# Altium PCB Main_Board.PcbDoc (part 8 of 14)
Units mm, origin at the board's own origin, x right, y up, seen from the top; angles counter-clockwise.
Board outline 142 x 82 mm, 10 copper layers (L1_Top, L2_PWR1, L3_Sig1, L4_GND1, L5_Sig2, L6_Sig3, L7_GND2, L8_Sig4, L9_GND3, L8_Bottom), stack 1.71 mm thick; 299 components, 328 nets, 2329 pads, 2908 vias.
Unrouted connection lines stored in the file: 2.
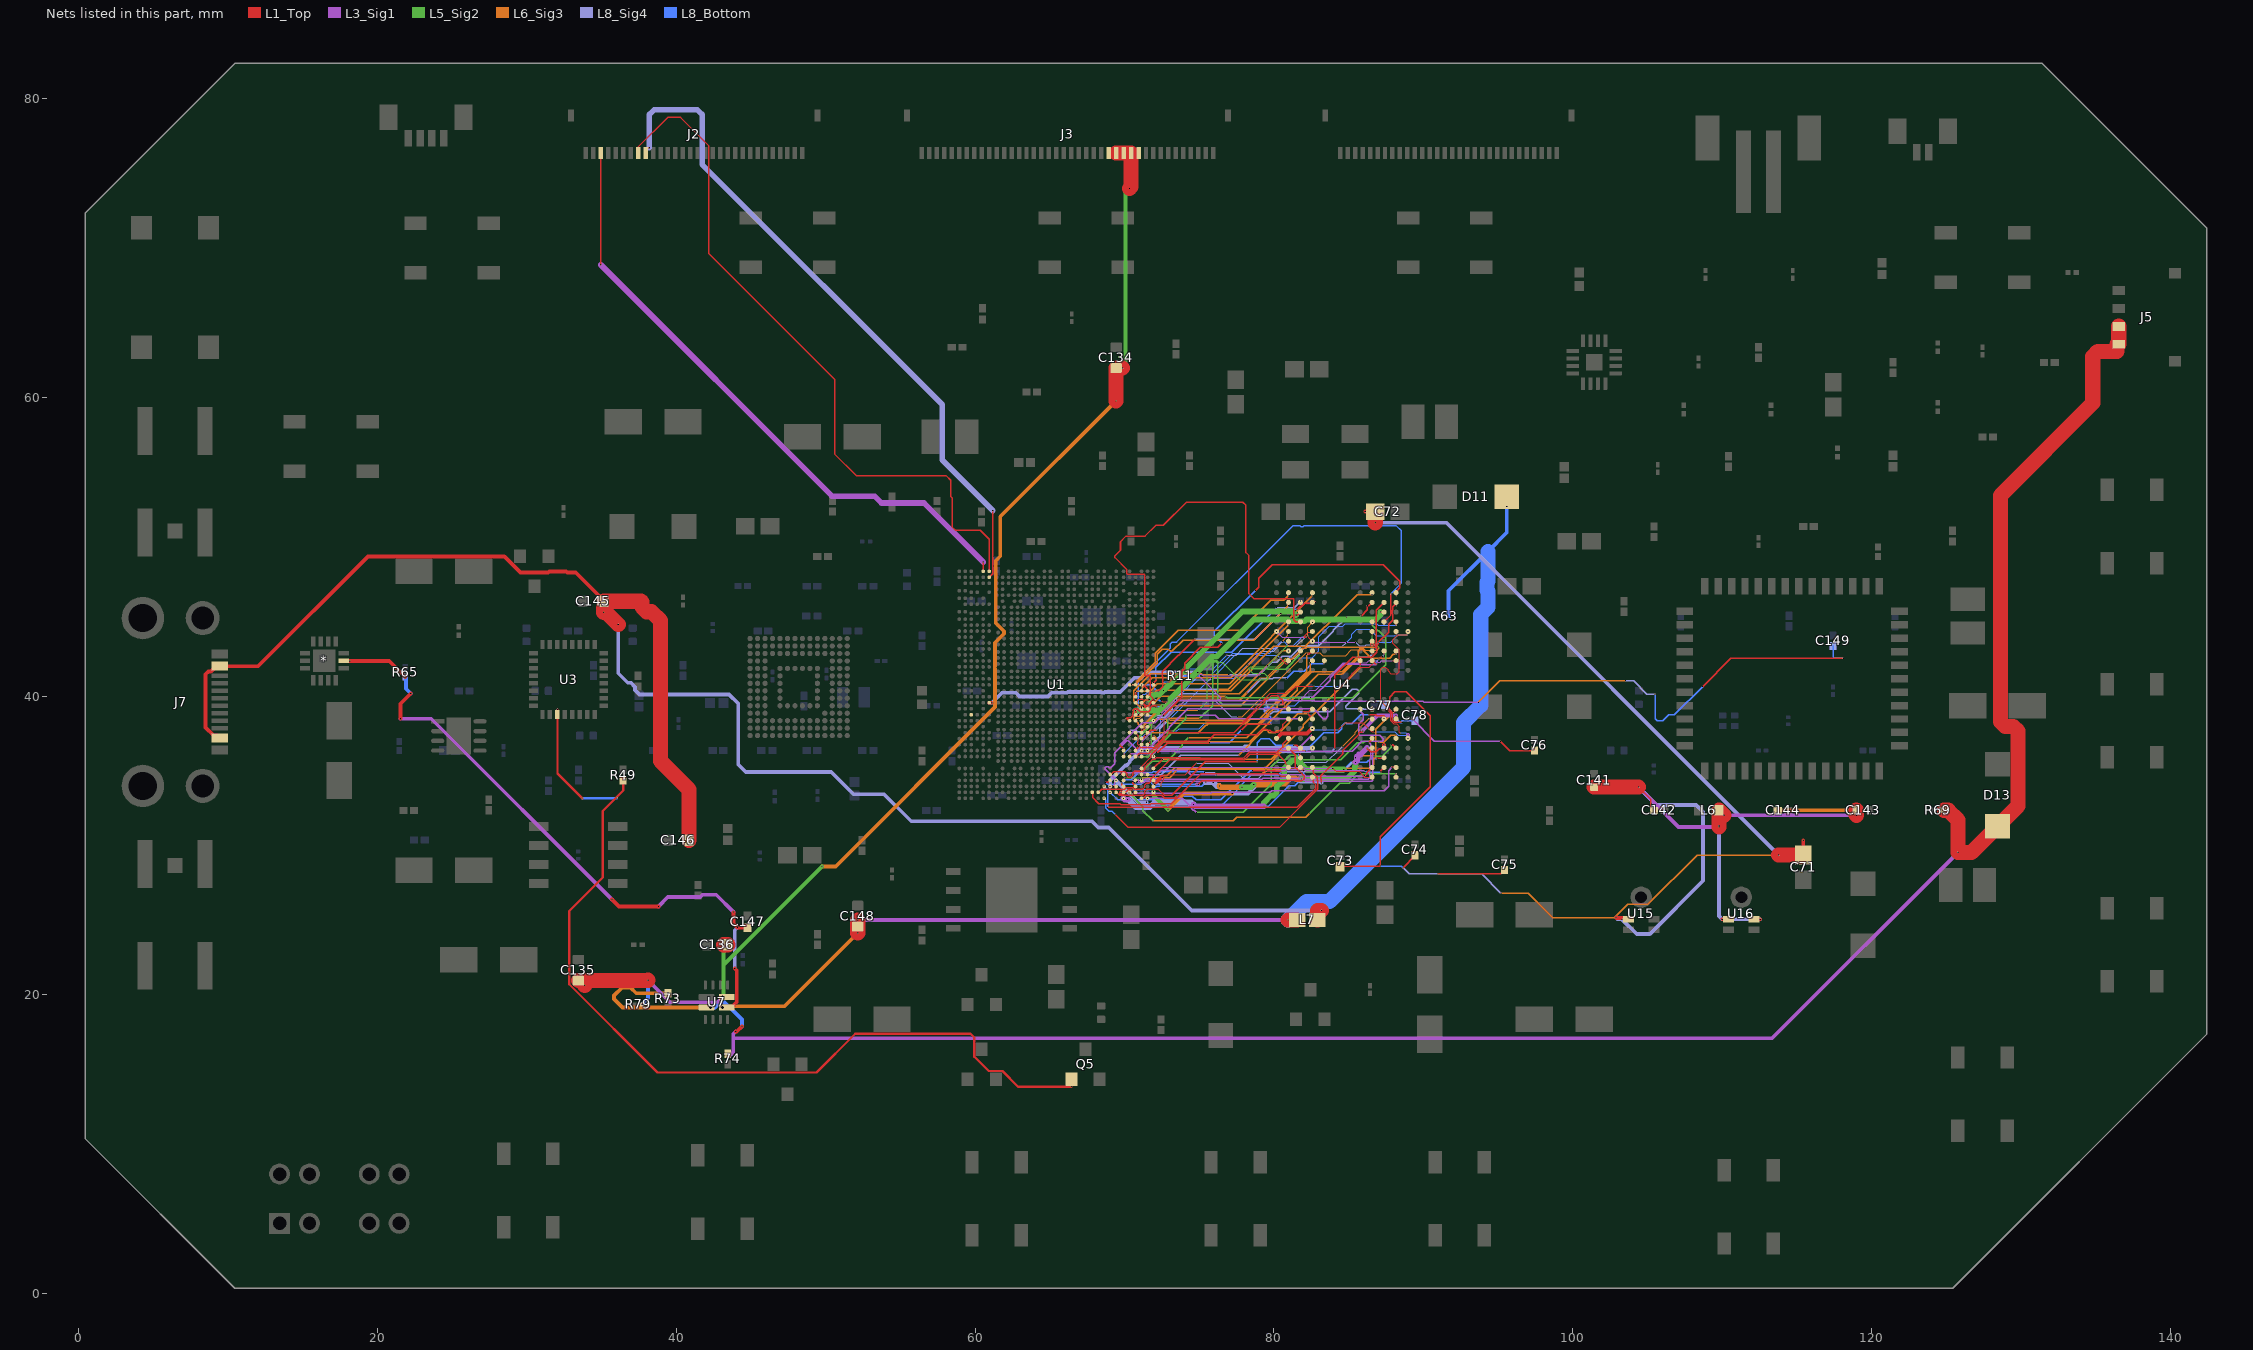
[diagram p15: the nets of this part, all layers, seen from the top]

## Via types
v1: diameter 0.1, hole 0.08, L1_Top to L8_Bottom, 1169 vias
v2: diameter 0.01, hole 0.01, L3_Sig1 to L8_Sig4, 433 vias
v3: diameter 0.01, hole 0.01, L8_Sig4 to L8_Bottom, 375 vias
v4: diameter 0.01, hole 0.01, L1_Top to L3_Sig1, 355 vias
v5: diameter 0.254, hole 0.01, L1_Top to L8_Bottom, 150 vias
v6: diameter 0.01, hole 0.01, L6_Sig3 to L8_Bottom, 129 vias
v7: diameter 0.05, hole 0.04, L1_Top to L8_Bottom, 104 vias
v8: diameter 0.01, hole 0.01, L1_Top to L5_Sig2, 89 vias
v9: diameter 0.01, hole 0.01, L1_Top to L8_Bottom, 41 vias
v10: diameter 0.1, hole 0.08, L1_Top to L3_Sig1, 17 vias
v11: diameter 0.1, hole 0.08, L1_Top to L5_Sig2, 11 vias
v12: diameter 0.1, hole 0.08, L8_Sig4 to L8_Bottom, 10 vias
v13: diameter 0.1, hole 0.08, L6_Sig3 to L8_Bottom, 9 vias
v14: diameter 1.27, hole 0.711, L1_Top to L8_Bottom, 8 vias
v15: diameter 0.4, hole 0.2, L1_Top to L8_Bottom, 4 vias
v16: diameter 0.05, hole 0.08, L1_Top to L8_Bottom, 3 vias
v17: diameter 0.05, hole 0.08, L6_Sig3 to L8_Bottom, 1 vias

## Nets (pads, with @x,y where several pads share a name; then routed paths per layer and width w, separated by ;. In a path a pad name is that pad's centre, name@x,y a point inside that pad or via, vN(x,y) a via of type N, cw(c..) or ccw(c..) an arc to the next point about the centre after c; other vN are vias at no path point) (continued)
CSI_A_D3P: J2.3 U1.A29 | length 41.9
  L1_Top w0.102: v1(34.941,68.869) J2.3@34.941,76.349 ; U1.A29@60.541,48.349 v1(60.541,48.963)
  L3_Sig1 w0.381: v1(34.941,68.869) 50.427,53.383 53.275,53.383 53.73,52.927 56.578,52.927 v1(60.541,48.963)
CSI_B_CLKN: J2.8 U1.A28 | length 47.5
  L1_Top w0.102: J2.8@37.441,76.349 37.441,76.751 39.423,78.732 40.28,78.732 42.185,76.827 42.185,69.613 50.593,61.206 50.593,56.202 52.04,54.754 58.047,54.754 58.365,54.437 58.365,53.361 58.456,53.27 58.456,51.323 58.682,51.097 60.346,51.097 60.941,50.502 U1.A28@60.941,48.349
CSI_B_CLKP: J2.9 U1.B28 | length 45.8
  L1_Top w0.102: J2.9@37.941,76.349 37.941,76.7 v1(38.197,76.7) ; U1.B28@60.941,47.949 61.184,48.192 v1(61.184,52.418)
  L8_Sig4 w0.381: v1(38.197,76.7) 38.197,78.922 38.515,79.24 41.41,79.24 41.728,78.922 41.728,75.582 57.806,59.504 57.806,55.796 v1(61.184,52.418)
DCIN: C134.1 C135.1 C136.1 J3.26 J3.27 J3.28 J3.29 J3.30 R79.2 U7.8 | length 84.3
  L1_Top w1.016: C135.1@33.441,20.949 33.844,20.949 ; v1(33.871,20.632) 33.871,20.922 33.844,20.949 ; v1(38.096,20.972) 38.073,20.949 33.844,20.949 ; v1(43.15,23.349) C136.1@43.441,23.349 ; v1(69.441,59.758) C134.1@69.441,61.949 v1(69.871,61.949) ; J3.27@69.441,76.349 J3.28@69.941,76.349 J3.29@70.441,76.349 70.441,74.095 v16(70.328,73.982)
  L3_Sig1 w0.254: v1(38.096,20.972) 39.569,19.499 42.741,19.499 v15(43.091,19.849)
  L5_Sig2 w0.254: v15(43.091,19.849) 43.15,19.908 43.15,21.988 ; v1(43.15,23.349) 43.15,21.988 ; v1(49.754,28.592) 43.15,21.988 ; v1(69.871,61.949) 70.074,62.152 70.074,73.728 v16(70.328,73.982)
  L6_Sig3 w0.254: v1(49.754,28.592) 50.669,28.592 61.337,39.26 61.337,41.815 61.311,41.841 61.311,41.98 61.337,42.006 61.337,43.569 61.935,44.167 61.935,44.33 61.384,44.881 61.384,49.049 61.69,49.355 61.69,52.007 v1(69.441,59.758)
  L8_Bottom w0.254: v3(37.696,19.349) 38.096,19.749 v1(38.096,20.972)
  other v2: 37.696,19.349
  other v4: 37.696,19.349
DCIN_TYPE-C: C145.1 C146.1 J7.A4 J7.B4 L7.2 | length 118.5
  L1_Top w0.254: J7.B4@9.441,37.199 9.268,37.372 9.011,37.372 8.49,37.892 8.49,41.463 8.674,41.646 8.838,41.646 9.191,41.999 J7.A4@9.441,41.999 12.008,41.999 19.355,49.346 28.486,49.346 29.561,48.272 31.431,48.272 31.491,48.332 32.636,48.332 32.696,48.272 33.268,48.272 35.141,46.399 C145.1@35.141,46.349
  L1_Top w1.016: v1(35.141,45.602) 35.141,45.771 ; v1(36.115,44.798) 35.141,45.771 ; C146.1@40.841,30.349 40.841,33.747 38.934,35.655 38.934,45.052 38.341,45.645 38.004,45.645 37.692,45.957 37.692,46.294 37.636,46.349 C145.1@35.141,46.349 35.141,45.771 ; L7.2@82.917,25.011 82.917,25.621 82.942,25.646 v1(83.181,25.646)
  L8_Sig4 w0.254: v1(36.115,44.798) 36.115,41.523 36.753,40.885 36.957,40.885 37.233,40.609 37.233,40.405 37.526,40.111 43.536,40.111 44.141,39.506 44.141,35.425 44.649,34.917 50.372,34.917 51.863,33.426 53.912,33.426 55.723,31.615 67.827,31.615 68.241,31.202 68.944,31.202 74.5,25.646 v1(83.181,25.646)
DCIN_USBC: *.2 C147.1 C148.1 D11.2 L7.1 R63.1 R65.1 U7.7 | length 125.9
  L1_Top w0.254: v1(18.141,42.349) 20.784,42.349 v4(21.855,41.278) ; v4(21.538,38.478) 21.538,39.485 v4(22.222,40.17) ; v4(35.695,26.378) 36.157,25.916 v4(38.797,25.916) ; v15(43.091,19.149) 43.691,19.149 44.038,19.496 44.038,21.643 v4(43.912,21.769) ; v4(43.835,25.531) 43.835,24.772 v2(44.099,24.508) 44.762,24.508 C147.1@44.776,24.494 ; v1(95.591,52.687) D11.2@95.591,53.349
  L1_Top w1.016: v1(52.142,24.133) C148.1@52.142,24.565 v1(52.142,25.011) ; v1(80.946,25.011) L7.1@81.565,25.011
  L3_Sig1 w0.254: v4(21.538,38.478) 23.595,38.478 v4(35.695,26.378) ; v4(38.797,25.916) 39.427,26.546 41.602,26.546 41.751,26.695 42.671,26.695 v4(43.835,25.531) ; v1(52.142,25.011) v1(80.946,25.011)
  L6_Sig3 w0.254: v15(43.091,19.149) 43.17,19.228 47.237,19.228 v1(52.142,24.133)
  L8_Sig4 w0.254: v4(43.912,21.769) 43.912,24.321 v2(44.099,24.508)
  L8_Bottom w0.254: R65.1@21.855,41.268 21.903,41.22 21.903,40.489 v4(22.222,40.17) ; R63.1@91.696,45.349 91.696,47.047 94.331,49.683 95.591,50.943 v1(95.591,52.687)
  L8_Bottom w1.016: v1(80.946,25.011) 82.176,26.242 83.726,26.242 92.706,35.222 92.706,38.235 93.849,39.378 93.849,45.458 94.331,45.941 94.331,47.019 94.272,47.078 94.272,47.62 94.331,47.68 94.331,49.683
  other v1: 43.091,19.149
  other v2: 43.912,21.769 22.222,40.17 21.855,41.278
  other v3: 22.222,40.17 21.855,41.278
  other v4: 44.099,24.508
DCIN_VIN: D13.1 J5.1 J5.2 R69.1 R73.1 R74.1 U7.2 | length 149.3
  L1_Top w0.254: v4(43.978,17.534) 44.044,17.534 v3(44.396,17.886)
  L1_Top w1.016: R69.1@124.869,32.349 125.141,32.349 125.798,31.693 v1(125.798,29.532) 126.699,29.532 D13.1@128.441,31.274 129.815,32.648 129.815,37.647 129.498,37.965 128.964,37.965 128.647,38.282 128.647,53.434 134.819,59.606 134.819,62.73 135.149,63.06 136.419,63.06 136.445,63.086 136.445,63.549 J5.1@136.566,63.549 J5.2@136.566,64.749
  L3_Sig1 w0.254: v4(43.441,16.003) 43.657,16.003 43.813,16.159 43.813,17.369 v4(43.978,17.534) ; 43.813,17.086 113.352,17.086 v1(125.798,29.532)
  L6_Sig3 w0.254: v9(39.441,20.103) 37.317,20.103 36.927,20.493 36.384,20.493 35.833,19.943 35.833,19.716 36.4,19.149 v15(42.291,19.149)
  L8_Bottom w0.254: v15(42.291,19.149) 42.59,19.149 42.937,19.496 43.235,19.496 44.396,18.335 v3(44.396,17.886)
  other v1: 42.291,19.149
  other v2: 44.396,17.886
  other v4: 44.396,17.886
DDR1_CAA0: U1.AT1 U4.H2 | length 20.6
  L1_Top w0.102: U1.AT1@71.941,33.549 v1(71.941,33.624) ; v4(83.182,34.187) 83.182,34.418 83.139,34.461 83.139,34.668 83.449,34.977 83.48,34.977 84.62,36.117 84.62,36.348 85.675,37.403 85.675,37.506 85.745,37.577 85.88,37.577 v4(85.95,37.648) ; U4.H2@88.18,38.468 v1(88.18,38.688)
  L3_Sig1 w0.254: v4(85.95,37.648) 85.95,37.692 86.946,38.688 v1(88.18,38.688)
  L5_Sig2 w0.254: v1(71.941,33.624) 71.941,33.351 v2(72.908,32.384)
  L6_Sig3 w0.254: v2(72.908,32.384) 73.999,33.475 v6(77.216,33.475)
  L8_Sig4 w0.254: v6(77.216,33.475) 78.279,33.475 78.946,34.141 80.577,34.141 80.86,34.425 81.639,34.425 81.781,34.283 83.087,34.283 v4(83.182,34.187)
  other v2: 83.182,34.187
DDR1_CAA1: U1.AR1 U4.J2 | length 19.7
  L1_Top w0.1: U1.AR1@71.941,33.949 v1(72.528,34.536) ; v1(88.017,38.955) U4.J2@88.18,39.118
  L6_Sig3 w0.1: v1(72.528,34.536) 73.027,34.536 73.574,35.083 79.382,35.083 79.427,35.128 79.527,35.128 79.572,35.083 81.375,35.083 81.45,35.158 86.433,35.158 86.7,35.425 86.7,35.789 86.822,35.912 86.822,37.76 v1(88.017,38.955)
DDR1_CAA2: U1.AN2 U4.H9 | length 13.4
  L1_Top w0.1: v1(71.366,34.734) 71.526,34.734 U1.AN2@71.541,34.749 ; v9(82.265,38.808) 82.58,38.493 U4.H9@82.58,38.468
  L6_Sig3 w0.1: v6(77.66,36.047) 79.306,37.693 79.56,37.693 79.705,37.548 79.779,37.548 79.799,37.528 79.94,37.528 79.959,37.548 80.081,37.548 80.21,37.677 80.484,37.677 81.615,38.808 v9(82.265,38.808)
  L8_Sig4 w0.1: v1(71.366,34.734) 72.454,34.734 73.767,36.047 v6(77.66,36.047)
DDR1_CAA3: U1.AL3 U4.H10 | length 12.6
  L1_Top w0.1: v1(70.966,35.949) U1.AL3@71.141,35.949 ; U4.H10@81.78,38.468 v1(81.78,38.568)
  L3_Sig1 w0.1: v8(74.107,38.698) 76.085,38.698 76.303,38.48 78.087,38.48 78.135,38.433 78.234,38.433 78.281,38.48 81.692,38.48 v1(81.78,38.568)
  L5_Sig2 w0.1: v1(70.966,35.949) 71.588,35.949 71.707,36.068 71.877,36.068 72.017,36.209 72.017,36.379 74.107,38.468 v8(74.107,38.698)
DDR1_CAA4: U1.AM3 U4.H11 | length 11.7
  L1_Top w0.102: U1.AM3@71.141,35.149 71.17,35.178 71.17,35.301 71.746,35.877 71.746,36.03 72.087,36.372 72.098,36.372 72.319,36.593 72.319,36.603 72.683,36.967 75.573,36.967 76.015,37.409 78.901,37.409 79.282,37.789 79.478,37.789 79.554,37.713 79.75,37.713 79.887,37.577 80.28,37.577 80.607,37.904 80.607,38.095 U4.H11@80.98,38.468
DDR1_CAA5: U1.AL4 U4.J11 | length 12.5
  L1_Top w0.102: U1.AL4@70.741,35.949 70.782,35.949 70.986,36.153 71.623,36.153 71.963,36.493 72.047,36.493 72.197,36.643 72.197,36.676 72.663,37.142 72.663,37.194 73.021,37.551 77.354,37.551 79.382,39.58 79.382,39.683 79.498,39.799 79.601,39.799 79.811,40.009 80.28,40.009 80.607,39.681 80.607,39.491 U4.J11@80.98,39.118
DDR1_CAB0: U1.AH1 U4.R2 | length 20
  L1_Top w0.1: U1.AH1@71.941,37.149 71.941,37.317 v1(71.954,37.33) ; v1(88.18,42.791) U4.R2@88.18,43.018
  L6_Sig3 w0.1: v1(71.954,37.33) 72.336,36.948 78.391,36.948 80.615,39.172 80.658,39.172 82.957,41.47 84.578,41.47 84.596,41.488 84.618,41.488 85.688,42.558 85.688,42.658 85.665,42.682 85.665,42.961 85.799,43.095 85.962,43.095 86.522,42.536 87.752,42.536 88.007,42.791 v1(88.18,42.791)
DDR1_CAB1: U1.AJ3 U4.P2 | length 19.6
  L1_Top w0.1: U1.AJ3@71.141,36.749 v1(71.141,36.924) ; v1(87.941,42.349) 88.161,42.349 U4.P2@88.18,42.368
  L3_Sig1 w0.04: v1(71.141,36.924) 73.69,39.473 80.625,39.473 v2(80.739,39.359) ; v3(81.788,39.76) 82.416,40.387 82.795,40.387 83.457,41.05 83.457,41.051 84.644,42.238 86.229,42.238 86.34,42.349 86.876,42.349 86.957,42.269 87.116,42.269 87.196,42.349 v1(87.941,42.349)
  L8_Bottom w0.04: v2(80.739,39.359) 81.387,39.359 v3(81.788,39.76)
  other v2: 81.788,39.76
  other v3: 80.739,39.359
DDR1_CAB2: U1.AG3 U4.R9 | length 14.8
  L1_Top w0.1: U1.AG3@71.141,37.549 71.141,37.711 71.167,37.736 v1(71.217,37.736) ; v1(82.19,42.791) 82.353,42.791 U4.R9@82.58,43.018
  L6_Sig3 w0.1: v1(71.217,37.736) 71.421,37.736 72.131,38.446 72.764,38.446 72.812,38.398 72.812,38.322 72.957,38.176 75.472,38.176 75.547,38.251 78.223,38.251 78.418,38.446 79.014,38.446 82.19,41.623 v1(82.19,42.791)
DDR1_CAB3: U1.AE5 U4.R10 | length 14.5
  L1_Top w0.1: U1.AE5@70.341,38.349 70.301,38.349 70.18,38.47 v1(70.094,38.47) 70.178,38.554 70.422,38.554 70.546,38.678 70.546,38.83 70.596,38.88 70.596,39.058 70.691,39.153 70.862,39.153 71.061,38.954 71.622,38.954 71.741,39.073 71.741,39.225 71.861,39.344 72.093,39.344 v2(72.171,39.266) ; v1(81.78,42.798) U4.R10@81.78,43.018
  L5_Sig2 w0.1: v2(78.418,41.813) 79.595,41.813 79.615,41.793 80.792,41.793 81.78,42.781 v1(81.78,42.798)
  L6_Sig3 w0.1: v6(76.307,40.458) 76.957,40.458 78.312,41.813 v2(78.418,41.813)
  L8_Sig4 w0.1: v3(72.561,39.337) 72.667,39.337 73.789,40.458 v6(76.307,40.458)
  L8_Bottom w0.1: v2(72.171,39.266) 72.49,39.266 v3(72.561,39.337)
  other v3: 72.171,39.266
  other v4: 72.171,39.266
DDR1_CAB4: U1.AG5 U4.R11 | length 13.4
  L1_Top w0.1: U1.AG5@70.341,37.549 v1(70.341,37.724)
  L6_Sig3 w0.1: v6(76.285,40.139) 77.691,40.139 80.57,43.018 v9(80.98,43.018)
  L8_Sig4 w0.1: v1(70.341,37.724) 70.75,37.724 70.858,37.616 71.267,37.616 72.212,38.562 72.652,38.562 73.197,39.106 73.197,39.594 73.741,40.139 v6(76.285,40.139)
DDR1_CAB5: U1.AG4 U4.P11 | length 14.7
  L1_Top w0.04: U1.AG4@70.741,37.549 70.741,37.505 70.906,37.34 70.906,36.949 70.873,36.916 70.873,36.784 71.073,36.584 72.01,36.584 72.106,36.681 72.106,36.714 72.572,37.18 72.572,37.231 72.673,37.332 72.673,38.311 v4(72.733,38.371) ; v3(80.39,42.552) 80.789,42.153 80.975,42.153 v1(80.978,42.149)
  L1_Top w0.1: v1(80.978,42.149) 80.978,42.366 U4.P11@80.98,42.368
  L8_Bottom w0.04: v4(72.733,38.371) 72.778,38.416 72.99,38.416 75.811,41.237 75.895,41.237 77.464,42.806 78.8,42.806 78.891,42.714 80.228,42.714 v3(80.39,42.552)
  other v2: 72.733,38.371 80.39,42.552
  other v3: 72.733,38.371
  other v4: 80.39,42.552
DDR1_CKEA0: U1.AN3 U4.J4 | length 20.7
  L1_Top w0.1: v1(70.966,34.734) 71.126,34.734 U1.AN3@71.141,34.749 ; v1(86.36,39.118) U4.J4@86.58,39.118
  L5_Sig2 w0.1: v1(70.966,34.734) 70.966,34.749 71.852,35.635 72.855,35.635 73.881,36.661 73.881,36.789 v2(74.283,37.191)
  L6_Sig3 w0.1: v2(74.283,37.191) 78.177,37.191 79.706,38.72 v6(79.736,38.72)
  L8_Sig4 w0.1: v6(79.736,38.72) 79.736,38.75 79.944,38.958 83.733,38.958 85.232,40.457 85.563,40.457 85.678,40.342 85.678,40.178 84.803,39.304 84.803,39.221 84.862,39.162 85.985,39.162 86.029,39.118 v1(86.36,39.118)
DDR1_CKEA1: U1.AL5 U4.J5 | length 21.4
  L1_Top w0.1: U1.AL5@70.341,35.949 70.341,36.124 v1(70.354,36.136) ; v1(85.704,39.042) U4.J5@85.78,39.118
  L3_Sig1 w0.1: v1(70.354,36.136) 71.929,36.136 72.101,36.308 73.376,36.308 73.41,36.274 73.472,36.274 73.507,36.308 85.258,36.308 85.645,36.695 85.645,36.731 85.899,36.985 87.063,36.985 87.069,36.979 87.247,36.979 87.317,37.05 87.317,37.149 87.079,37.387 85.932,37.387 85.926,37.381 85.764,37.381 85.694,37.452 85.694,38.122 85.977,38.405 85.977,38.77 v1(85.704,39.042)
DDR1_CKEB0: U1.AL1 U4.P4 | length 19.6
  L1_Top w0.1: U4.P4@86.58,42.368 86.8,42.148 v1(86.897,42.148)
  L3_Sig1 w0.1: v2(82.441,39.907) 82.609,39.907 83.76,41.057 83.76,41.225 84.673,42.138 85.83,42.138 85.879,42.089 86.838,42.089 v1(86.897,42.148)
  L6_Sig3 w0.1: v6(71.777,36.727) 71.777,36.434 71.941,36.27 v9(71.941,35.977) ; v6(72.975,38.371) 78.174,38.371 v6(78.936,39.133)
  L8_Sig4 w0.1: v6(71.777,36.727) 72.355,37.305 72.355,37.794 72.932,38.371 v6(72.975,38.371) ; v6(78.936,39.133) 79.31,39.133 79.436,39.007 79.536,39.007 79.606,39.077 79.606,39.304 79.505,39.405 79.505,39.632 79.642,39.769 80.931,39.769 81.068,39.907 v2(82.441,39.907)
DDR1_CKEB1: U1.AM1 U4.P5 | length 17.2
  L1_Top w0.1: U1.AM1@71.941,35.149 v1(72.547,35.755) ; v1(85.78,42.018) U4.P5@85.78,42.368
  L6_Sig3 w0.1: v1(72.547,35.755) 79.837,35.755 81.978,37.896 81.978,38.078 85.78,41.881 v1(85.78,42.018)
DDR1_CLKA_C: U1.AK3 U4.J9 | length 14.2
  L1_Top w0.089: v4(72.132,36.233) 72.229,36.233 72.848,36.852 75.621,36.852 75.642,36.873 v3(75.703,36.873) ; v4(77.825,37.697) 78.225,38.097 v3(79.809,38.097) ; v4(81.94,38.883) 82.001,38.944 82.338,38.944 82.512,39.118 U4.J9@82.58,39.118
  L8_Bottom w0.089: v3(71.154,36.336) 71.257,36.233 v4(72.132,36.233) ; v3(75.703,36.873) 77.001,36.873 v4(77.825,37.697) ; v3(79.809,38.097) 79.783,38.124 79.783,38.607 79.74,38.65 79.707,38.65 79.371,38.986 79.371,39.174 79.439,39.242 80.022,39.242 80.074,39.19 80.166,39.19 80.473,38.883 v4(81.94,38.883)
  other v2: 72.132,36.233 71.154,36.336 75.703,36.873 77.825,37.697 79.809,38.097 81.94,38.883
  other v3: 72.132,36.233 77.825,37.697 81.94,38.883
  other v4: 71.154,36.336 75.703,36.873 79.809,38.097
DDR1_CLKA_T: U1.AK4 U4.J8 | length 15.1
  L1_Top w0.1: U1.AK4@70.741,36.349 70.741,36.39 70.927,36.576 v1(70.927,36.603) ; U4.J8@83.38,39.118 83.597,39.118 v1(83.613,39.133)
  L3_Sig1 w0.1: v1(70.927,36.603) 70.938,36.613 71.769,36.613 73.009,37.853 73.009,37.894 74.249,39.133 82.656,39.133 83.298,38.491 83.462,38.491 83.613,38.642 v1(83.613,39.133)
DDR1_CLKB_C: U1.AH3 U4.P9 | length 14.1
  L1_Top w0.1: U1.AH3@71.141,37.149 71.182,37.149 71.385,37.352 v1(71.415,37.352) ; v1(82.444,42.232) U4.P9@82.58,42.368
  L6_Sig3 w0.1: v1(71.415,37.352) 71.415,37.36 71.588,37.533 74.926,37.533 75.449,38.056 75.522,38.056 75.597,38.131 78.273,38.131 78.279,38.137 78.953,38.137 79.656,38.84 79.666,38.84 80.011,39.184 80.171,39.184 80.242,39.254 80.242,39.353 80.216,39.378 80.216,39.478 80.286,39.548 80.293,39.548 82.444,41.699 v1(82.444,42.232)
DDR1_CLKB_T: U1.AH4 U4.P8 | length 15.6
  L1_Top w0.1: v1(70.566,37.149) U1.AH4@70.741,37.149 ; v1(83.38,42.148) U4.P8@83.38,42.368
  L5_Sig2 w0.1: v1(70.566,37.149) 70.858,37.149 71.657,37.949 71.657,38.235 72.194,38.771 72.381,38.771 72.399,38.753 72.525,38.753 72.529,38.757 72.654,38.757 73.32,39.423 73.32,39.612 v2(73.427,39.719)
  L6_Sig3 w0.1: v2(73.427,39.719) 77.724,39.719 v6(78.21,40.205)
  L8_Sig4 w0.1: v6(78.21,40.205) 79.167,41.162 79.904,41.162 79.979,41.237 80.753,41.237 v3(80.828,41.162)
  L8_Bottom w0.1: v3(80.828,41.162) 81.321,41.655 82.037,41.655 82.53,42.148 v1(83.38,42.148)
DDR1_CSA0: U1.AP1 U4.H4 | length 17.2
  L1_Top w0.04: U1.AP1@71.941,34.349 72.129,34.349 72.466,34.686 72.551,34.686 72.601,34.736 74.067,34.736 74.821,35.489 v4(74.821,35.507)
  L1_Top w0.1: v1(86.36,38.468) U4.H4@86.58,38.468
  L6_Sig3 w0.04: v6(84.579,36.606) 85.464,37.49 85.464,37.572 v1(86.36,38.468)
  L8_Sig4 w0.04: v4(74.821,35.507) 76.934,35.507 77.944,34.498 78.985,34.498 79.451,34.963 79.496,34.963 80.084,35.552 83.517,35.552 84.404,36.439 84.413,36.439 v6(84.579,36.606)
  other v2: 74.821,35.507
DDR1_CSA1: U1.AP3 U4.H3 | length 18.5
  L1_Top w0.1: U1.AP3@71.141,34.349 v1(71.141,34.434) ; v4(86.361,38.753) 86.838,38.753 86.903,38.688 87.38,38.688 v1(87.38,38.491) U4.H3@87.38,38.468
  L6_Sig3 w0.1: v1(71.141,34.434) 71.231,34.524 72.347,34.524 72.478,34.656 72.824,34.656 73.371,35.203 79.333,35.203 79.378,35.248 79.499,35.248 80.572,36.321 82.12,36.321 v6(82.125,36.326)
  L8_Bottom w0.1: v6(82.125,36.326) 83.336,37.537 84.261,37.537 84.534,37.81 84.534,37.98 84.747,38.193 84.847,38.193 84.882,38.158 85.221,38.158 85.816,38.753 v4(86.361,38.753)
  other v2: 86.361,38.753
  other v3: 86.361,38.753
DDR1_CSB0: U1.AK2 U4.R4 | length 24.4
  L1_Top w0.1: v1(86.58,42.798) U4.R4@86.58,43.018
  L5_Sig2 w0.1: v8(71.541,36.349) 71.702,36.188 71.827,36.188 71.897,36.259 71.897,36.428 72.906,37.437 v2(72.906,38.473) ; v2(75.049,38.502) 75.907,39.36 75.907,42.202 76.007,42.302 76.149,42.302 76.25,42.202 76.25,39.762 76.584,39.428 v2(80.336,39.428)
  L6_Sig3 w0.1: v2(72.906,38.473) 72.936,38.502 v2(75.049,38.502) ; v2(80.336,39.428) 80.59,39.428 81.56,40.398 81.56,40.638 82.53,41.608 84.568,41.608 v6(85.568,42.608)
  L8_Sig4 w0.1: v6(85.568,42.608) 86.39,42.608 v1(86.58,42.798)
DDR1_CSB1: U1.AJ2 U4.R3 | length 18.7
  L1_Top w0.04: U1.AJ2@71.541,36.749 71.716,36.924 71.716,36.957 v4(71.702,36.971) ; v3(72.733,37.683) 73.172,37.683 v4(73.193,37.661) ; v3(75.441,38.251) 77.925,38.251 78.693,39.019 78.693,39.122 79.753,40.182 80.844,40.182 81.037,40.375 81.208,40.375 81.489,40.656 v4(82.687,40.656) ; v3(84.733,40.939) 85.213,41.419 85.213,41.448 85.693,41.928 86.399,41.928 86.629,42.158 v4(86.629,42.164) ; v3(87.036,42.461) 87.207,42.631 v4(87.268,42.631)
  L1_Top w0.1: v1(87.38,42.798) U4.R3@87.38,43.018
  L8_Sig4 w0.04: v4(87.268,42.631) 87.312,42.675 87.312,42.714 87.38,42.782 v1(87.38,42.798)
  L8_Bottom w0.04: v4(71.702,36.971) 71.971,37.24 72.29,37.24 v3(72.733,37.683) ; v4(73.193,37.661) 73.51,37.661 73.667,37.818 75.008,37.818 v3(75.441,38.251) ; v4(82.687,40.656) 84.449,40.656 v3(84.733,40.939) ; v4(86.629,42.164) 86.739,42.164 v3(87.036,42.461)
  other v2: 71.702,36.971 73.193,37.661 72.733,37.683 75.441,38.251 82.687,40.656 84.733,40.939 86.629,42.164 87.036,42.461 87.268,42.631
  other v3: 71.702,36.971 73.193,37.661 82.687,40.656 86.629,42.164
  other v4: 72.733,37.683 75.441,38.251 84.733,40.939 87.036,42.461
DDR1_DQ0: U1.AU2 U4.F2 | length 20.4
  L1_Top w0.1: U4.F2@88.18,37.168 v1(88.18,37.388)
  L3_Sig1 w0.1: v4(71.541,33.149) 73.872,33.149 74.355,32.665 74.355,32.629 74.62,32.365 74.656,32.365 v8(74.813,32.208)
  L5_Sig2 w0.1: v8(74.813,32.208) 77.936,32.208 79.823,34.095 79.823,35.251 80.32,35.748 80.772,35.748 81.075,36.051 81.516,36.051 81.819,35.748 84.466,35.748 85.576,36.858 85.988,36.858 86.115,36.985 86.957,36.985 v2(87.032,36.91)
  L6_Sig3 w0.1: v2(87.032,36.91) 87.358,36.91 87.836,37.388 v1(88.18,37.388)
DDR1_DQ1: U1.AP4 U4.E4 | length 18.3
  L1_Top w0.1: U1.AP4@70.741,34.349 70.782,34.349 70.845,34.286 v1(70.859,34.286) ; U4.E4@86.58,36.518 v1(86.702,36.396)
  L3_Sig1 w0.1: v1(70.859,34.286) 70.951,34.194 71.241,34.194 71.278,34.231 71.329,34.231 71.393,34.296 81.091,34.296 81.143,34.348 82.08,34.348 82.133,34.296 86.568,34.296 86.627,34.355 86.627,36.321 v1(86.702,36.396)
DDR1_DQ2: U1.AN6 U4.C4 | length 17.7
  L1_Top w0.1: v10(69.744,34.739) 69.754,34.749 U1.AN6@69.941,34.749 ; v1(86.078,34.675) 86.213,34.811 86.213,34.851 U4.C4@86.58,35.218
  L3_Sig1 w0.1: v10(69.744,34.739) 69.874,34.869 71.416,34.869 71.551,34.734 72.177,34.734 72.461,35.019 74.164,35.019 74.444,34.738 82.03,34.738 82.146,34.622 86.025,34.622 v1(86.078,34.675)
DDR1_DQ3: U1.AP6 U4.B4 | length 20.3
  L1_Top w0.04: v8@71.931,34.184 72.049,34.184 72.491,34.626 72.565,34.626 72.618,34.573 72.618,34.346 72.457,34.185 v2(72.457,33.957) ; v4(83.942,35.158) 84.137,34.962 85.733,34.962 85.929,34.766 85.929,34.716 85.99,34.655 85.99,34.636 86.058,34.568 U4.B4@86.58,34.568
  L1_Top w0.1: U1.AP6@69.941,34.349 69.941,34.39 70.031,34.48 v1(70.031,34.524)
  L3_Sig1 w0.04: v2(72.109,34.824) 72.524,35.239 82.001,35.239 82.082,35.158 v4(83.942,35.158)
  L5_Sig2 w0.04: v1(70.031,34.524) 71.591,34.524 v2(72.026,34.089)
  L8_Sig4 w0.04: v3(71.918,34.196) 72.218,34.196 v2(72.457,33.957)
  L8_Bottom w0.04: v3(71.918,34.196) 72.109,34.387 v2(72.109,34.824)
  other v3: 72.109,34.824
  other v4: 72.457,33.957
  other v8: 71.93,34.185
DDR1_DQ4: U1.AT5 U4.B2 | length 20.3
  L1_Top w0.1: U4.B2@88.18,34.568 v1(88.18,34.788)
  L5_Sig2 w0.1: v8(70.309,33.517) 71.225,32.602 71.225,32.329 v2(71.918,31.636) ; v2(82.395,32.163) 84.406,34.174 85.039,34.174 85.521,34.656 85.818,34.656 85.95,34.788 86.021,34.788 86.028,34.795 86.127,34.795 86.135,34.788 v1(88.18,34.788)
  L6_Sig3 w0.1: v2(71.918,31.636) 77.269,31.636 77.521,31.888 82.12,31.888 v2(82.395,32.163)
DDR1_DQ5: U1.AU3 U4.E2 | length 19.2
  L1_Top w0.1: U1.AU3@71.141,33.149 71.17,33.178 71.294,33.178 71.461,33.344 72.512,33.344 72.707,33.149 73.316,33.149 v3(73.472,33.305) ; v3(78.575,35.008) 80.051,35.008 80.092,34.966 80.435,34.966 v4(80.476,34.925) ; v1(87.862,36.738) 87.96,36.738 U4.E2@88.18,36.518
  L5_Sig2 w0.1: v2(86.702,35.961) 87.243,35.961 87.862,36.581 v1(87.862,36.738)
  L6_Sig3 w0.1: v6(85.467,35.868) 85.587,35.988 86.675,35.988 v2(86.702,35.961)
  L8_Sig4 w0.1: v4(80.476,34.925) 84.63,34.925 85.467,35.762 v6(85.467,35.868)
  L8_Bottom w0.1: v3(73.472,33.305) 74.532,33.305 74.789,33.048 76.456,33.048 78.416,35.008 v3(78.575,35.008)
  other v2: 73.472,33.305 80.476,34.925 78.575,35.008
  other v4: 73.472,33.305 78.575,35.008
DDR1_DQ6: U1.AT4 U4.C2 | length 19.2
  L1_Top w0.1: v1(70.557,33.535) 70.727,33.535 U1.AT4@70.741,33.549 ; v1(87.901,35.218) U4.C2@88.18,35.218
  L3_Sig1 w0.1: v1(70.557,33.535) 70.747,33.535 70.807,33.475 71.862,33.475 71.892,33.504 75.79,33.504 75.836,33.55 79.734,33.55 79.854,33.67 87.382,33.67 87.677,33.964 87.677,34.993 v1(87.901,35.218)
DDR1_DQ7: U1.AR4 U4.F4 | length 19.4
  L1_Top w0.1: v1(70.557,34.286) 70.557,34.174 70.741,33.99 U1.AR4@70.741,33.949 ; v1(86.37,36.865) 86.37,36.893 86.58,37.103 U4.F4@86.58,37.168
  L3_Sig1 w0.1: v1(70.557,34.286) 70.677,34.406 70.909,34.406 71.001,34.314 71.191,34.314 71.293,34.416 71.48,34.416 71.51,34.446 72.448,34.446 72.478,34.416 79.201,34.416 79.294,34.51 82.089,34.51 82.182,34.416 86.312,34.416 86.432,34.536 86.432,35.755 86.48,35.803 86.48,36.204 86.496,36.219 86.496,36.627 86.48,36.642 86.48,36.755 v1(86.37,36.865)
DDR1_DQ8: U1.AU9 U4.C9 | length 18.1
  L1_Top w0.102: v4(69.377,32.076) 70.224,31.229 80.404,31.229 82.942,33.768 82.942,34.087 82.941,34.089 82.941,34.318 82.898,34.361 82.898,34.591 82.626,34.863 82.626,35.172 U4.C9@82.58,35.218
  L8_Bottom w0.102: v2(68.629,33.165) 68.751,33.043 68.751,32.499 68.963,32.287 69.166,32.287 v4(69.377,32.076)
  other v2: 69.377,32.076
  other v3: 69.377,32.076 68.629,33.165
  other v4: 68.629,33.165
DDR1_DQ9: U1.AR8 U4.E9 | length 15
  L8_Sig4 w0.254: v4(69.041,33.949) 69.041,34.339 70.048,35.345 70.13,35.345 70.354,35.569 70.354,35.651 71.002,36.3 71.002,36.399 71.121,36.518 71.22,36.518 77.947,36.518 78.054,36.625 78.317,36.625 78.424,36.518 v2(82.58,36.518)
  other v2: 69.041,33.949
  other v4: 82.58,36.518
DDR1_DQ10: U1.AR9 U4.B9 | length 16.8
  L1_Top w0.102: v3(68.873,32.549) 81.552,32.549 82.821,33.818 82.821,34.04 82.626,34.236 82.626,34.522 U4.B9@82.58,34.568
  L8_Bottom w0.102: v3(68.629,33.968) 68.873,33.724 v3(68.873,32.549)
  other v2: 68.873,32.549 68.629,33.968
  other v4: 68.873,32.549 68.629,33.968
DDR1_DQ11: U1.AT10 U4.C11 | length 14.5
  L1_Top w0.102: U1.AT10@68.241,33.549 68.282,33.549 68.486,33.753 70.023,33.753 70.123,33.854 70.56,33.854 70.66,33.753 71.223,33.753 71.346,33.877 71.346,34.03 71.469,34.153 71.623,34.153 71.746,34.277 71.746,34.43 73.037,35.722 78.012,35.722 78.399,36.109 80.28,36.109 80.753,35.635 80.753,35.509 80.98,35.283 U4.C11@80.98,35.218
DDR1_DQ12: U1.AR7 U4.F9 | length 17.7
  L1_Top w0.1: v1(69.262,33.952) 69.264,33.949 U1.AR7@69.441,33.949 ; U4.F9@82.58,37.168 v1(82.58,37.406)
  L3_Sig1 w0.1: v1(69.262,33.952) 69.363,34.053 69.363,34.458 68.721,35.1 68.721,35.199 68.792,35.269 68.909,35.269 68.974,35.204 69.091,35.204 69.363,35.476 69.363,36.215 70.167,37.019 70.249,37.019 70.802,36.466 81.64,36.466 v1(82.58,37.406)
DDR1_DQ13: U1.AP8 U4.E11 | length 16.8
  L1_Top w0.102: v3(68.737,34.223) 68.875,34.223 69.001,34.349 U1.AP8@69.041,34.349 ; v4(74.943,34.078) 75.138,34.273 75.192,34.327 81.08,34.327 81.101,34.349 81.48,34.349 81.502,34.327 81.88,34.327 82.021,34.468 82.021,34.668 81.744,34.944 81.713,34.944 81.437,35.22 81.437,36.061 U4.E11@80.98,36.518
  L3_Sig1 w0.254: v3(74.844,34.089) 74.932,34.089 v4(74.943,34.078)
  L8_Bottom w0.102: v3(68.737,34.223) 68.871,34.089 69.751,34.089 69.786,34.054 69.886,34.054 69.921,34.089 71.109,34.089 71.527,34.507 71.602,34.507 71.75,34.359 71.75,34.237 71.897,34.089 v3(74.844,34.089)
  other v2: 74.844,34.089 68.737,34.223
  other v4: 68.737,34.223
DDR1_DQ14: U1.AN8 U4.F11 | length 13.7
  L1_Top w0.102: U1.AN8@69.041,34.749 69.082,34.749 69.277,34.945 70.022,34.945 70.141,34.826 70.141,34.672 70.26,34.553 70.423,34.553 70.546,34.677 70.546,34.83 70.669,34.953 71.223,34.953 71.346,35.077 71.346,35.23 71.869,35.753 72.023,35.753 72.145,35.876 75.037,35.876 75.07,35.843 77.962,35.843 78.349,36.23 80.233,36.23 80.584,36.581 80.584,36.772 U4.F11@80.98,37.168
DDR1_DQ15: U1.AT11 U4.B11 | length 14.6
  L1_Top w0.102: U1.AT11@67.841,33.549 67.87,33.521 67.87,33.202 68.282,32.79 69.708,32.79 69.768,32.73 71.715,32.73 71.774,32.79 73.127,32.79 75.146,34.809 80.28,34.809 80.475,34.614 80.934,34.614 U4.B11@80.98,34.568
DDR1_DQ16: U1.AE4 U4.U2 | length 20.6
  L1_Top w0.1: U1.AE4@70.741,38.349 v1(70.741,38.524) ; v1(88.18,44.098) U4.U2@88.18,44.318
  L6_Sig3 w0.04: v1(70.741,38.524) 71.014,38.524 71.917,39.427 72.715,39.427 73.186,39.897 77.775,39.897 79.094,41.216 79.475,41.216 80.794,42.536 81.127,42.536 81.136,42.544 v6(81.157,42.544)
  L8_Sig4 w0.04: v6(81.157,42.544) 81.399,42.544 82.141,43.286 84.56,43.286 v3(84.873,43.599)
  L8_Bottom w0.04: v3(84.873,43.599) 85.21,43.936 85.21,44.148 85.546,44.485 86.391,44.485 86.844,44.032 88.098,44.032 88.164,44.098 v1(88.18,44.098)
DDR1_DQ17: U1.AF2 U4.V4 | length 23.3
  L1_Top w0.1: v1(71.381,37.934) 71.527,37.934 U1.AF2@71.541,37.949 ; v1(86.58,44.748) U4.V4@86.58,44.968
  L5_Sig2 w0.1: v2(76.758,39.996) 76.886,39.868 81.786,39.868 81.822,39.832 82.694,39.832 82.75,39.888 85.29,39.888 87.5,42.098 87.5,43.902 87.038,44.365 86.963,44.365 v1(86.58,44.748)
  L6_Sig3 w0.1: v1(71.381,37.934) 71.317,37.871 71.168,37.871 70.93,38.109 70.93,38.166 70.692,38.404 70.621,38.475 70.621,38.574 70.692,38.644 70.832,38.644 70.847,38.629 70.988,38.629 71.349,38.99 71.349,39.078 71.646,39.375 71.646,39.546 71.704,39.604 71.779,39.604 71.866,39.517 71.956,39.517 72.435,39.996 v2(76.758,39.996)
DDR1_DQ18: U1.AG2 U4.U4 | length 20.3
  L1_Top w0.1: U1.AG2@71.541,37.549 71.716,37.724 v1(72.176,37.724) ; v1(86.58,44.098) U4.U4@86.58,44.318
  L5_Sig2 w0.04: v1(86.58,44.098) 86.58,43.708 v2(87.067,43.221)
  L6_Sig3 w0.04: v6(77.572,38.61) 77.882,38.61 82.153,42.881 83.086,42.881 83.259,42.708 84.804,42.708 85.181,43.085 85.661,43.085 85.707,43.131 85.762,43.185 85.999,43.185 86.112,43.073 86.919,43.073 v2(87.067,43.221)
  L8_Sig4 w0.04: v1(72.176,37.724) 72.176,37.74 72.265,37.829 72.265,37.84 72.778,38.353 72.778,38.408 74.046,39.676 76.078,39.676 77.144,38.61 v6(77.572,38.61)
DDR1_DQ19: U1.AE1 U4.Y2 | length 27.1
  L1_Top w0.1: v2(84.087,36.499) 84.087,41.429 85.266,42.608 86.56,42.608 86.895,42.944 86.895,43.426 86.984,43.514 86.984,43.611 87.317,43.944 87.345,43.944 87.678,44.277 87.678,44.805 87.955,45.083 87.955,45.503 87.94,45.519 87.94,45.717 87.955,45.733 87.955,45.978 U4.Y2@88.18,46.203 ; v1(88.18,46.056) U4.Y2@88.18,46.203 ; U4.Y2@88.18,46.268 U4.Y2@88.18,46.203
  L5_Sig2 w0.1: v2(71.777,36.308) 71.777,38.185 v8(71.941,38.349)
  L8_Sig4 w0.1: v2(71.777,36.308) 73.376,36.308 73.41,36.274 77.981,36.274 78.136,36.428 78.235,36.428 78.417,36.246 82.438,36.246 82.473,36.282 83.869,36.282 v2(84.087,36.499)
  other v4: 84.087,36.499
DDR1_DQ20: U1.AC3 U4.AA4 | length 19.1
  L1_Top w0.1: v1(71.134,39.337) 71.134,39.156 U1.AC3@71.141,39.149 ; v1(86.58,46.782) U4.AA4@86.58,46.918
  L6_Sig3 w0.1: v1(71.134,39.337) 71.134,39.444 71.653,39.963 71.653,40.163 71.702,40.212 72.013,40.212 72.178,40.377 74.628,40.377 74.666,40.338 77.113,40.338 78.553,41.778 78.553,41.884 79.716,43.048 79.716,43.069 79.769,43.122 79.79,43.122 79.993,43.324 82.102,43.324 83.405,44.628 83.43,44.628 85.584,46.782 v1(86.58,46.782)
DDR1_DQ21: U1.AD2 U4.AA2 | length 25.8
  L1_Top w0.1: v1(71.366,38.749) U1.AD2@71.541,38.749 ; v4(72.602,38.682) 73.84,39.919 73.84,41.624 74.02,41.804 74.02,42.207 75.078,43.265 76.253,43.265 v3(76.512,43.524) ; v4(78.76,47.058) 78.98,47.278 78.98,47.894 79.877,48.791 87.33,48.791 88.438,47.682 88.438,47.241 88.18,46.983 U4.AA2@88.18,46.918 v1(88.18,46.698)
  L8_Sig4 w0.1: v1(71.366,38.749) 71.434,38.682 v4(72.602,38.682)
  L8_Bottom w0.1: v3(76.512,43.524) 76.512,43.559 76.021,44.05 76.021,44.319 v4(78.76,47.058)
  other v2: 72.602,38.682 76.512,43.524 78.76,47.058
  other v3: 78.76,47.058
  other v4: 76.512,43.524
DDR1_DQ22: U1.AE3 U4.V2 | length 26.5
  L1_Top w0.1: U1.AE3@71.141,38.349 v1(71.141,38.524) ; v1(88.18,44.748) U4.V2@88.18,44.968
  L5_Sig2 w0.04: v2(74.943,39.039) 75.531,39.627 75.531,41.784 75.817,42.069 75.817,42.239 75.97,42.392 76.187,42.392 76.307,42.272 76.54,42.272 77.722,41.091 79.487,41.091 79.625,41.229 79.625,41.266 79.37,41.521 78.583,41.521 78.328,41.776 78.328,41.85 78.446,41.968 80.327,41.968 80.935,42.577 v9(80.935,42.581)
  L6_Sig3 w0.04: v1(71.141,38.524) 71.141,38.025 71.206,37.961 71.28,37.961 72.358,39.039 v2(74.943,39.039)
  L8_Bottom w0.04: v9(80.935,42.581) 81.13,42.581 81.138,42.589 81.176,42.589 81.187,42.577 82.565,42.577 83.017,43.03 83.017,43.972 83.712,44.666 84.615,44.666 84.787,44.838 86.899,44.838 86.996,44.741 88.173,44.741 v1(88.18,44.748)
DDR1_DQ23: U1.AC2 U4.Y4 | length 20.7
  L1_Top w0.1: v9(71.258,39.336) 71.281,39.336 ; v4(71.27,39.296) 71.281,39.307 71.281,39.336 ; U1.AC2@71.541,39.149 71.501,39.149 71.417,39.233 71.385,39.233 71.281,39.336 ; v4(85.852,45.353) 85.854,45.353 86.262,45.761 v1(86.262,46.048) 86.36,46.048 U4.Y4@86.58,46.268
  L6_Sig3 w0.1: v9(71.258,39.336) 71.276,39.318 71.276,39.302 71.191,39.217 v6(71.141,39.217) 71.085,39.217 71.014,39.287 71.014,39.294 70.621,39.687 70.621,40.352 71.764,41.494 75.154,41.494 75.215,41.432 v6(76.984,41.432)
  L8_Sig4 w0.1: v9(71.258,39.336) 71.276,39.318 71.276,39.302 v4(71.27,39.296) ; v6(76.984,41.432) 79.029,41.432 79.864,42.268 80.186,42.268 80.395,42.477 80.421,42.477 80.465,42.521 80.465,42.547 80.574,42.656 81.157,42.656 81.878,43.376 83.018,43.376 83.992,44.351 83.992,44.398 v3(84.873,45.278)
  L8_Bottom w0.1: v3(84.873,45.278) 85.777,45.278 v4(85.852,45.353)
  other v2: 71.27,39.296 85.852,45.353
  other v3: 85.852,45.353
DDR1_DQ24: U1.AB1 U4.U9 | length 13.8
  L1_Top w0.04: v4(72.487,39.693) 72.561,39.62 v3(72.844,39.62) ; v4(82.309,44.024) 82.284,43.999 82.187,43.999 82.132,43.944 82.051,43.944 82.028,43.967 82.028,44 82.288,44.261 82.523,44.261 U4.U9@82.58,44.318
  L1_Top w0.1: U1.AB1@71.941,39.549 71.97,39.578 71.97,39.684 72.011,39.725 v1(72.011,39.742)
  L8_Bottom w0.04: 72.346,39.693 v4(72.487,39.693) ; v3(72.844,39.62) 72.986,39.761 72.986,39.9 73.009,39.924 73.042,39.924 73.069,39.897 73.54,39.897 75.087,41.444 75.833,41.444 77.255,42.866 79.725,42.866 80.478,43.618 80.682,43.618 80.943,43.358 81.293,43.358 81.914,43.979 82.264,43.979 v4(82.309,44.024)
  L8_Bottom w0.1: v1(72.011,39.742) 72.297,39.742 72.346,39.693
  other v2: 72.844,39.62 72.487,39.693 82.309,44.024
  other v3: 72.487,39.693 82.309,44.024
  other v4: 72.844,39.62
DDR1_DQ25: U1.AA3 U4.U11 | length 12.1
  L1_Top w0.04: v3(72.915,40.939) 73.027,40.939 v4(73.93,41.842)
  L1_Top w0.1: U1.AA3@71.141,39.949 v1(71.141,40.124) ; v1(80.98,44.098) U4.U11@80.98,44.318
  L6_Sig3 w0.04: v6(80.58,43.663) 80.774,43.858 80.774,43.892 v1(80.98,44.098)
  L8_Sig4 w0.04: v3(76.846,42.735) 77.467,42.735 77.931,43.199 80.116,43.199 v6(80.58,43.663)
  L8_Bottom w0.04: v1(71.141,40.124) 71.397,40.124 71.496,40.223 71.878,40.223 71.889,40.212 72.271,40.212 72.551,40.492 72.551,40.81 72.681,40.939 v3(72.915,40.939) ; v4(73.93,41.842) 75.953,41.842 v3(76.846,42.735)
  other v2: 72.915,40.939 73.93,41.842
  other v3: 73.93,41.842
  other v4: 72.915,40.939
DDR1_DQ26: U1.AA4 U4.V11 | length 12.6
  L1_Top w0.1: U1.AA4@70.741,39.949 v1(70.741,40.302) ; v1(80.971,44.747) 80.98,44.756 U4.V11@80.98,44.968
  L6_Sig3 w0.1: v1(70.741,40.302) 70.767,40.327 71.648,40.327 71.652,40.332 71.732,40.332 72.21,40.81 77.034,40.81 v1(80.971,44.747)
DDR1_DQ27: U1.AA2 U4.V9 | length 13.7
  L1_Top w0.1: v1(71.533,40.133) 71.533,39.958 U1.AA2@71.541,39.949
  L6_Sig3 w0.04: v6(82.264,43.934) 82.264,44.606 v9(82.58,44.922)
  L8_Sig4 w0.04: v3(72.613,40.377) 73.474,40.377 74.191,41.094 75.753,41.094 v3(75.835,41.177) ; v3(78.254,42.086) 79.168,43 79.775,43 79.788,42.987 79.988,42.987 80.326,43.324 81.479,43.324 82.089,43.934 v6(82.264,43.934)
  L8_Bottom w0.04: v1(71.533,40.133) 71.544,40.121 71.642,40.121 71.671,40.092 72.328,40.092 v3(72.613,40.377) ; v3(75.835,41.177) 77.345,41.177 v3(78.254,42.086)
DDR1_DQ28: U1.Y3 U4.AA9 | length 14.4
  L1_Top w0.1: U1.Y3@71.141,40.349 v1(71.141,40.531) ; v1(82.571,46.703) 82.58,46.711 U4.AA9@82.58,46.918
  L6_Sig3 w0.1: v1(71.141,40.531) 71.845,41.234 77.103,41.234 v1(82.571,46.703)
DDR1_DQ29: U1.W4 U4.AA11 | length 13.4
  L1_Top w0.1: U1.W4@70.741,40.749 v1(70.741,40.937) ; v1(80.971,46.703) 80.98,46.712 U4.AA11@80.98,46.918
  L6_Sig3 w0.1: v1(70.741,40.937) 72.061,42.257 72.061,42.854 73.599,44.391 77.796,44.391 79.803,46.398 80.666,46.398 v1(80.971,46.703)
DDR1_DQ30: U1.W5 U4.Y11 | length 13.5
  L1_Top w0.1: U1.W5@70.341,40.749 v1(70.481,40.749) ; v1(80.971,46.042) 80.98,46.051 U4.Y11@80.98,46.268
  L6_Sig3 w0.1: v1(70.481,40.749) 70.724,40.749 72.181,42.207 72.181,42.804 72.52,43.143 72.932,43.143 73.09,42.985 73.173,42.985 73.92,43.731 78.66,43.731 v1(80.971,46.042)
DDR1_DQ31: U1.W3 U1.Y2 U4.Y9 | length 15.6
  L1_Top w0.1: v3(71.141,40.749) 71.182,40.749 71.281,40.65 71.347,40.65 71.513,40.484 71.513,40.378 U1.Y2@71.541,40.349 ; v4(72.233,40.302) 72.551,40.62 72.551,41.299 72.516,41.334 72.516,41.633 73.603,42.719 73.626,42.719 v2(74.712,43.806) ; v4(81.556,45.793) 81.77,46.008 81.859,46.008 82.073,46.222 82.534,46.222 U4.Y9@82.58,46.268 v1(82.8,46.268)
  L8_Sig4 w0.1: v2(74.712,43.806) 74.716,43.802 78.731,43.802 v3(80.464,45.535)
  L8_Bottom w0.1: v3(71.141,40.749) 71.786,40.749 v4(72.233,40.302) ; v3(80.464,45.535) 80.722,45.793 v4(81.556,45.793)
  other v2: 72.233,40.302 71.141,40.749 81.556,45.793
  other v3: 72.233,40.302 81.556,45.793
  other v4: 71.141,40.749 74.712,43.806
DDR1_DQM0: U1.AR6 U4.C3 | length 18.6
  L1_Top w0.1: v4(69.836,34.175) 69.812,34.151 69.812,34.052 69.914,33.949 U1.AR6@69.941,33.949 ; v1(87.16,34.908) 87.16,34.998 U4.C3@87.38,35.218
  L3_Sig1 w0.1: v2(79.477,35.008) 80.722,35.008 80.791,35.077 82.036,35.077 82.111,35.002 v2(86.119,35.002)
  L6_Sig3 w0.1: v6(76.153,34.716) 79.161,34.716 79.307,34.862 79.331,34.862 v2(79.477,35.008)
  L8_Sig4 w0.1: v3(75.35,34.87) 75.999,34.87 v6(76.153,34.716)
  L8_Bottom w0.1: v4(69.836,34.175) 70.065,34.404 70.467,34.404 70.917,34.854 71.845,34.854 71.905,34.914 75.306,34.914 v3(75.35,34.87) ; v2(86.119,35.002) 86.213,34.908 v1(87.16,34.908)
  other v2: 69.836,34.175
  other v3: 69.836,34.175 86.119,35.002
DDR1_DQM1: U1.AP7 U4.C10 | length 14.8
  L1_Top w0.102: U4.C10@81.78,35.218 81.789,35.218 v2(82.005,35.002)
  L8_Sig4 w0.254: v2(69.443,34.353) 70.906,32.89 v3(71.467,32.89)
  L8_Bottom w0.102: v3(71.467,32.89) 71.742,32.615 79.634,32.615 81.016,33.997 81.406,33.997 82.005,34.596 v2(82.005,35.002)
  other v3: 82.005,35.002
  other v4: 69.443,34.353 82.005,35.002
DDR1_DQM2: U1.AF3 U4.Y3 | length 21.2
  L1_Top w0.1: U1.AF3@71.141,37.949 71.141,37.953 v1(71.243,38.054) ; v1(86.775,43.163) 86.775,43.476 86.864,43.564 86.864,45.752 U4.Y3@87.38,46.268
  L6_Sig3 w0.1: v1(71.243,38.054) 71.247,38.054 72.529,39.337 77.775,39.337 80.884,42.446 81.186,42.446 81.936,43.196 82.143,43.196 82.218,43.271 85.72,43.271 85.724,43.275 86.037,43.275 86.041,43.271 86.667,43.271 v1(86.775,43.163)
DDR1_DQM3: U1.W1 U4.Y10 | length 12.8
  L1_Top w0.1: U1.W1@71.941,40.749 v1(71.941,40.924) 71.99,40.924 72.113,41.048 v3(72.113,41.143)
  L8_Sig4 w0.1: v3(80.18,45.918) 81.356,45.918 v2(81.787,46.349)
  L8_Bottom w0.1: v3(72.113,41.143) 72.11,41.146 72.11,41.922 73.12,42.932 77.194,42.932 v3(80.18,45.918)
  other v2: 72.113,41.143
  other v4: 72.113,41.143 81.787,46.349
DDR1_DQSN0: U1.AT6 U4.E3 | length 20.1
  L1_Top w0.089: U1.AT6@69.941,33.549 69.972,33.58 70.104,33.58 70.263,33.739 70.512,33.739 v2(70.541,33.709) ; v4(86.235,36.519) 86.472,36.282 86.865,36.282 87.053,36.47 87.332,36.47 U4.E3@87.38,36.518
  L1_Top w0.254: v1(69.766,33.549) U1.AT6@69.941,33.549 ; U4.E3@87.38,36.518 v1(87.38,36.738)
  L3_Sig1 w0.381: v8(85.467,35.559) 85.564,35.656 85.564,35.957 85.691,36.083 85.8,36.083 v4(86.235,36.519)
  L5_Sig2 w0.381: v2(77.858,33.891) 78.48,33.891 v2(78.656,34.067) ; v2(81.844,34.435) 84.865,34.435 85.415,34.985 85.415,35.277 85.467,35.329 v8(85.467,35.559)
  L6_Sig3 w0.381: v6(76.351,33.979) 76.439,33.891 v2(77.858,33.891) ; v2(78.656,34.067) 79.111,34.067 79.126,34.082 79.787,34.082 79.842,34.137 80.733,34.137 81.085,34.489 81.438,34.489 81.491,34.435 v2(81.844,34.435)
  L8_Sig4 w0.381: v3(75.441,34.241) 75.913,34.241 v3(75.944,34.21) 76.175,33.979 v6(76.351,33.979)
  L8_Bottom w0.089: v2(70.541,33.709) 71.865,33.709 72.129,33.974 75.174,33.974 v3(75.441,34.241)
  other v3: 70.541,33.709
  other v4: 70.541,33.709
DDR1_DQSN1: U1.AT7 U4.E10 | length 15.4
  L1_Top w0.102: U1.AT7@69.441,33.549 69.482,33.549 69.677,33.353 71.223,33.353 71.342,33.473 71.342,33.627 71.461,33.746 72.281,33.746 72.673,33.353 73.163,33.353 75.406,35.596 v4(78.892,35.596) ; v2(81.334,36.707) 81.526,36.707 81.715,36.518 U4.E10@81.78,36.518
  L8_Bottom w0.102: v4(78.892,35.596) 78.892,36.879 79.16,37.147 79.69,37.147 80.13,36.707 v2(81.334,36.707)
  other v2: 78.892,35.596
  other v3: 78.892,35.596 81.334,36.707
  other v4: 81.334,36.707
DDR1_DQSN2: U1.AD3 U4.V3 | length 31.3
  L1_Top w0.102: v1(70.938,38.749) U1.AD3@71.141,38.749 ; U4.V3@87.38,44.968 87.835,45.423 87.835,45.453 87.819,45.469 87.819,45.767 87.835,45.783 v1(87.835,46.853)
  L8_Bottom w0.102: v1(70.938,38.749) 70.938,41.074 73.07,43.206 73.07,43.478 73.204,43.611 73.488,43.611 81.265,51.389 81.757,51.389 81.823,51.322 81.945,51.322 82.011,51.389 88.21,51.389 88.539,51.059 88.539,47.558 v1(87.835,46.853)
DDR1_DQSN3: U1.AB3 U4.V10 | length 34.3
  L1_Top w0.102: U1.AB3@71.141,39.549 71.182,39.549 71.274,39.457 71.331,39.457 71.435,39.353 71.622,39.353 71.741,39.472 71.741,39.589 71.746,39.589 71.746,39.63 71.84,39.725 71.878,39.763 71.878,39.87 71.737,40.011 71.737,41.318 71.71,41.345 71.37,41.345 71.344,41.37 71.344,48.125 71.319,48.15 70.205,48.15 70.137,48.218 70.137,48.49 69.36,49.267 69.36,49.383 69.734,49.757 69.734,50.329 70.109,50.704 71.383,50.704 72.111,51.432 72.603,51.432 74.147,52.976 77.923,52.976 78.132,52.768 78.132,49.605 78.329,49.407 78.329,46.855 78.66,46.525 81.301,46.525 81.327,46.499 81.327,45.102 81.461,44.968 U4.V10@81.78,44.968
DDR1_DQSP0: U1.AU6 U4.D3 | length 20.6
  L1_Top w0.102: v1(86.895,35.815) 86.902,35.822 87.334,35.822 U4.D3@87.38,35.868
  L3_Sig1 w0.381: v4(69.941,33.149) 70.025,33.066 v2(70.207,33.066) ; v2(74.616,32.737) 74.728,32.625 v8(79.332,32.625)
  L5_Sig2 w0.381: v8(79.332,32.625) 79.332,32.852 79.815,33.334 79.993,33.334 80.201,33.542 80.201,33.939 80.692,34.43 80.692,35.156 81.227,35.692 81.507,35.692 81.711,35.487 81.824,35.487 82.229,35.083 v9(84.682,35.083)
  L8_Sig4 w0.381: v2(70.207,33.066) 70.253,33.066 70.766,32.552 71.684,32.552 72.006,32.874 74.479,32.874 v2(74.616,32.737)
  L8_Bottom w0.102: v9(84.682,35.083) 85.158,35.559 86.222,35.559 86.478,35.815 v1(86.895,35.815)
DDR1_DQSP1: U1.AT8 U4.D10 | length 14.8
  L1_Top w0.102: v3(81.73,36.146) 81.734,36.142 81.734,35.914 U4.D10@81.78,35.868
  L8_Bottom w0.102: v3(69.041,33.549) 69.525,33.066 73.997,33.066 74.326,32.737 76.585,32.737 77.533,33.684 77.533,33.761 78.48,34.708 79.08,34.708 79.16,34.789 79.303,34.789 79.384,34.708 80.292,34.708 v3(81.73,36.146)
  other v2: 69.041,33.549 81.73,36.146
  other v4: 69.041,33.549 81.73,36.146
DDR1_DQSP2: U1.AD4 U4.W3 | length 20
  L1_Top w0.102: U1.AD4@70.741,38.749 v1(70.741,39.032) ; v1(87.143,45.618) U4.W3@87.38,45.618
  L5_Sig2 w0.381: v1(70.741,39.032) 72.335,39.032 72.584,39.281 72.81,39.281 73.06,39.53 73.06,39.808 75.874,42.623 76.152,42.623 78.657,45.128 80.937,45.128 81.067,44.997 82.054,44.997 82.185,45.128 82.435,45.128 82.445,45.137 82.669,45.137 82.679,45.128 86.838,45.128 87.143,45.433 v1(87.143,45.618)
DDR1_DQSP3: U1.AB4 U4.W10 | length 13.9
  L1_Top w0.01: 71.044,39.749 71.054,39.759
  L1_Top w0.04: U1.AB4@70.741,39.549 70.966,39.774 71.141,39.774 cw(c71.141,39.549) 71.222,39.759 71.649,39.759 v1(71.659,39.77)
  L1_Top w0.102: v1(81.479,45.407) 81.569,45.407 U4.W10@81.78,45.618
  L5_Sig2 w0.381: v1(71.659,39.77) 71.671,39.77 71.903,40.002 71.934,40.002 72.018,40.086 72.323,40.086 72.96,40.724 73.004,40.724 73.131,40.85 73.131,40.894 73.863,41.626 74.019,41.626 74.145,41.752 74.145,41.909 77.898,45.661 81.225,45.661 v1(81.479,45.407)
DDR1_PVREF: C149.1 U1.AK6 | length 56.1
  L1_Top w0.1: v4(69.696,36.718) 69.89,36.524 v1(69.941,36.524) U1.AK6@69.941,36.349 ; v4(108.702,40.634) 110.598,42.53 v1(118.131,42.53)
  L3_Sig1 w0.1: v4(69.696,36.718) 71.175,38.197 72.011,38.197 73.49,39.676 81.745,39.676 81.751,39.67 81.825,39.67 81.832,39.676 82.722,39.676 82.75,39.648 89.983,39.648 90.064,39.567 v2(93.687,39.567)
  L6_Sig3 w0.1: v2(93.687,39.567) 95.139,41.019 v6(103.532,41.019)
  L8_Sig4 w0.1: v6(103.532,41.019) 104.076,41.019 104.978,40.117 v3(105.523,40.117)
  L8_Bottom w0.1: v3(105.523,40.117) 105.523,38.491 105.66,38.354 106.03,38.354 106.427,38.751 106.819,38.751 v4(108.702,40.634) ; C149.1@117.441,43.349 117.441,42.585 117.496,42.53 v1(118.131,42.53)
  other v2: 108.702,40.634
  other v3: 108.702,40.634
DDR1_PZQ: U1.AN7
DDR1_RST: U1.AL6 U4.T11 | length 17.9
  L1_Top w0.1: U1.AL6@69.941,35.949 v1(69.941,36.124) ; v1(80.98,43.448) U4.T11@80.98,43.668
  L3_Sig1 w0.04: v3(72.431,38.828) 73.368,39.766 76.325,39.766 76.326,39.767 76.362,39.767 76.407,39.767 76.46,39.82 76.46,39.894 76.407,39.947 76.383,39.947 75.034,41.296 75.034,41.391 75.087,41.444 75.184,41.444 75.286,41.342 78.893,41.342 v8(79.58,42.028)
  L5_Sig2 w0.04: v8(79.58,42.028) 80.274,42.723 80.274,42.742 v1(80.98,43.448)
  L8_Bottom w0.04: v1(69.941,36.124) 71.133,37.315 71.251,37.315 71.378,37.442 71.733,37.442 72.431,38.14 v3(72.431,38.828)
  other v2: 72.431,38.828
DDR_ID: U1.AD31
DMIC_VDD: C141.1 C142.1 C143.1 C144.1 L6.2 U15.2 U16.2 U16.4 | length 55.6
  L1_Top w0.102: v1(104.417,33.899) 105.215,33.101 105.215,32.53 105.396,32.349 C142.1@105.441,32.349
  L1_Top w0.254: v2(102.916,25.179) 102.948,25.147 103.643,25.147 U15.2@103.741,25.049 ; v1(110.016,25.049) U16.2@110.441,25.049 ; U16.4@112.141,25.049 v1(112.566,25.049)
  L1_Top w1.016: C141.1@101.441,33.899 v1(104.417,33.899) ; v1(109.791,31.234) v1(109.791,31.314) L6.2@109.791,32.349 109.8,32.349 v1(110.128,32.021) ; C143.1@118.991,32.349 118.991,32.025 v1(118.995,32.021)
  L3_Sig1 w0.254: v1(104.417,33.899) 107.082,31.234 v1(109.791,31.234) ; v1(110.128,32.021) v1(118.995,32.021)
  L6_Sig3 w0.254: v9(113.787,32.349) 118.667,32.349 v1(118.995,32.021)
  L8_Sig4 w0.254: v2(102.916,25.179) 103.046,25.049 v1(103.316,25.049) 104.29,24.075 105.171,24.075 108.728,27.632 108.728,32.249 108.264,32.713 105.603,32.713 v1(104.417,33.899) ; v1(109.791,31.314) v1(109.791,31.234) 109.791,25.274 v1(110.016,25.049) v1(112.566,25.049)
  other v4: 102.916,25.179
DRAM1_VDD1_1V8: C71.1 C72.1 C73.1 C74.1 C75.1 C76.1 C77.1 C78.1 | length 107.8
  L1_Top w0.1: C73.1@84.441,28.571 84.481,28.611 v3(87.131,28.611) 87.131,30.58 90.464,33.912 90.464,38.679 88.853,40.289 88.109,40.289 87.748,39.928 87.748,39.719 87.638,39.609 87.638,39.404 87.69,39.352 87.69,39.147 87.824,39.013 87.824,38.979 87.918,38.884 87.918,38.39 88.081,38.228 88.58,38.228 v4(88.594,38.214) ; v4(88.654,28.491) 88.654,28.517 89.441,29.304 C74.1@89.441,29.349 ; v4(90.981,28.094) 95.186,28.094 95.214,28.122 95.26,28.122 95.441,28.304 C75.1@95.441,28.349 ; v4(95.172,36.971) 95.794,36.349 C76.1@97.441,36.349
  L1_Top w0.254: v1(86.113,52.349) C72.1@86.79,52.349 ; C71.1@115.441,29.349 v1(115.441,30.344)
  L1_Top w1.016: v1(86.79,51.605) C72.1@86.79,52.349 ; v1(113.793,29.349) C71.1@115.441,29.349
  L3_Sig1 w0.1: v2(89.252,38.468) 90.749,36.971 v4(95.172,36.971)
  L6_Sig3 w0.1: v6(95.205,26.796) 97.035,26.796 98.679,25.152 102.783,25.152 103.69,26.059 105.044,26.059 108.334,29.349 v1(113.793,29.349)
  L8_Sig4 w0.1: v4(88.654,28.491) 89.051,28.094 v4(90.981,28.094) 93.907,28.094 v6(95.205,26.796)
  L8_Sig4 w0.254: v1(86.79,51.605) 91.537,51.605 v1(113.793,29.349)
  L8_Bottom w0.1: v3(87.131,28.611) 88.534,28.611 v4(88.654,28.491) ; C77.1@87.441,39.349 87.487,39.349 87.81,39.026 87.81,38.87 88.466,38.214 ; v4(88.594,38.214) 88.466,38.214 ; C78.1@89.441,38.349 88.601,38.349 88.466,38.214
  other v2: 90.981,28.094 88.654,28.491 87.131,28.611 88.594,38.214
  other v3: 88.654,28.491 88.594,38.214 89.252,38.468
  other v4: 87.131,28.611
DRAM_VDD1_1V8: U4.F1 U4.F12 U4.G4 U4.G9 U4.T4 U4.T9 U4.U1 U4.U12 | length 30.5
  L1_Top w0.05: v4(82.214,43.934) 82.314,43.934 v4(82.58,43.668) ; v4(84.326,37.736) 84.808,38.218 85.96,38.218 v1(86.36,37.818) 86.521,37.657 ; U4.G4@86.58,37.818 86.524,37.762 86.524,37.66 86.521,37.657 ; v4(86.747,37.606) 86.571,37.606 86.521,37.657 ; v4(88.473,37.532) 88.462,37.543 88.424,37.543 88.395,37.572 88.395,37.957 88.219,38.133 88.041,38.133 87.823,38.351 87.823,38.845 87.595,39.073 87.595,39.207 87.165,39.637 87.165,41.807 87.291,41.933 87.469,41.933 87.654,41.748 87.654,41.687 87.838,41.503 88.269,41.503 88.395,41.629 88.395,43.107 87.965,43.537 87.965,43.757 88.131,43.923 88.139,43.923 88.314,44.098 v1(88.98,44.098)
  L1_Top w0.254: U4.F12@80.18,37.168 80.203,37.168 80.52,37.485 82.224,37.485 82.557,37.818 v3(82.568,37.818) ; v1(86.571,43.439) 86.571,43.659 U4.T4@86.58,43.668
  L3_Sig1 w0.05: v4(80.18,44.318) 80.564,43.934 v4(82.214,43.934) ; v4(82.58,43.668) 82.649,43.599 v2(85.467,43.599)
  L3_Sig1 w0.254: v4(88.98,37.168) v1(88.98,37.388)
  L8_Sig4 w0.05: v2(85.467,43.599) 85.713,43.353 86.106,43.353 86.192,43.439 v1(86.571,43.439) 86.823,43.439 v3(86.984,43.599)
  L8_Bottom w0.05: v3(82.568,37.818) 82.65,37.736 v4(84.326,37.736) ; v4(86.747,37.606) 88.096,37.606 88.314,37.388 v1(88.98,37.388) ; v3(86.984,43.599) 87.816,43.599 88.314,44.098 v1(88.98,44.098) v3(88.98,44.318) ; v4(88.473,37.532) 88.822,37.532 v1@88.966,37.388
  other v2: 88.473,37.532 86.747,37.606 84.326,37.736 82.568,37.818 88.98,44.318
  other v3: 88.473,37.532 86.747,37.606 84.326,37.736
  other v4: 82.568,37.818 88.98,44.318
EMMC_EN: Q5.1 R49.1 U3.11 | length 63.9
  L1_Top w0.152: v1(32.041,39.099) U3.11@32.041,38.749 32.041,34.817 v4(33.693,33.165) ; R49.1@36.441,34.349 36.441,33.671 35.079,32.308 35.079,27.845 32.837,25.604 32.837,20.699 38.733,14.803 49.375,14.803 51.971,17.399 59.689,17.399 59.945,17.143 59.945,15.859 60.909,14.895 61.831,14.895 62.877,13.849 v1(66.441,13.849) Q5.1@66.441,14.349
  L8_Bottom w0.152: v4(33.693,33.165) 36.023,33.165 v1(36.033,33.175)
  other v2: 33.693,33.165
  other v3: 33.693,33.165
ENET_EXTRES: R11.1 U1.AB28 | length 16
  L1_Top w0.203: U1.AB28@60.941,39.549 v1(61.134,39.549)
  L8_Sig4 w0.254: v1(61.134,39.549) 61.803,40.219 62.731,40.219 62.978,39.971 64.878,39.971 65.126,40.219 66.157,40.219 66.214,40.275 68.412,40.275 68.463,40.224 68.646,40.224 68.696,40.275 69.717,40.275 70.659,41.216 71.09,41.216 71.446,41.572 v12(74.9,41.572)
  L8_Bottom w0.203: R11.1@74.05,41.349 74.678,41.349 v12(74.9,41.572)